# Altium PCB STM32F030F.PcbDoc
Units mil, origin at the board's own origin, x right, y up, seen from the top; angles counter-clockwise.
Board outline 1300 x 1315 mil, 2 copper layers (Top Layer, Bottom Layer); 45 components, 43 nets, 202 pads, 44 vias.
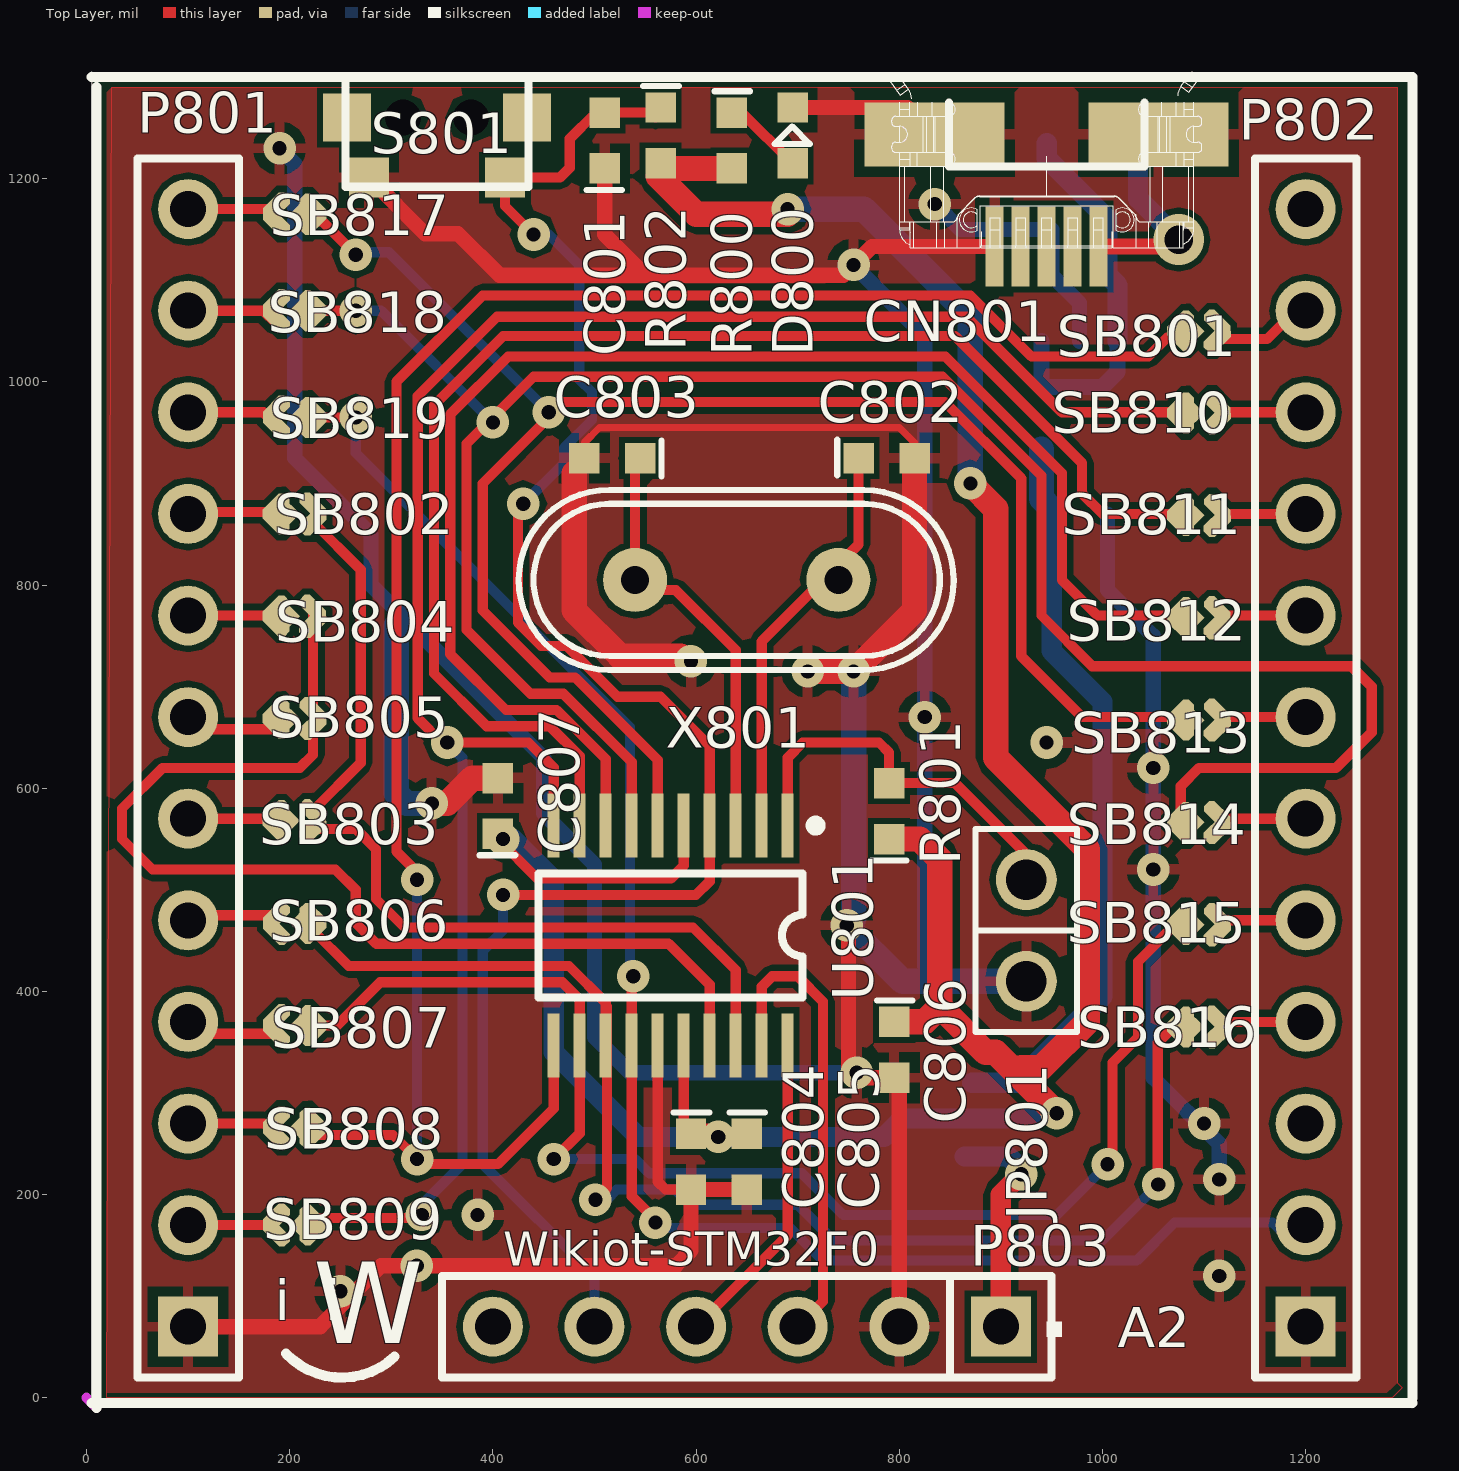
[diagram p0: Top Layer view]
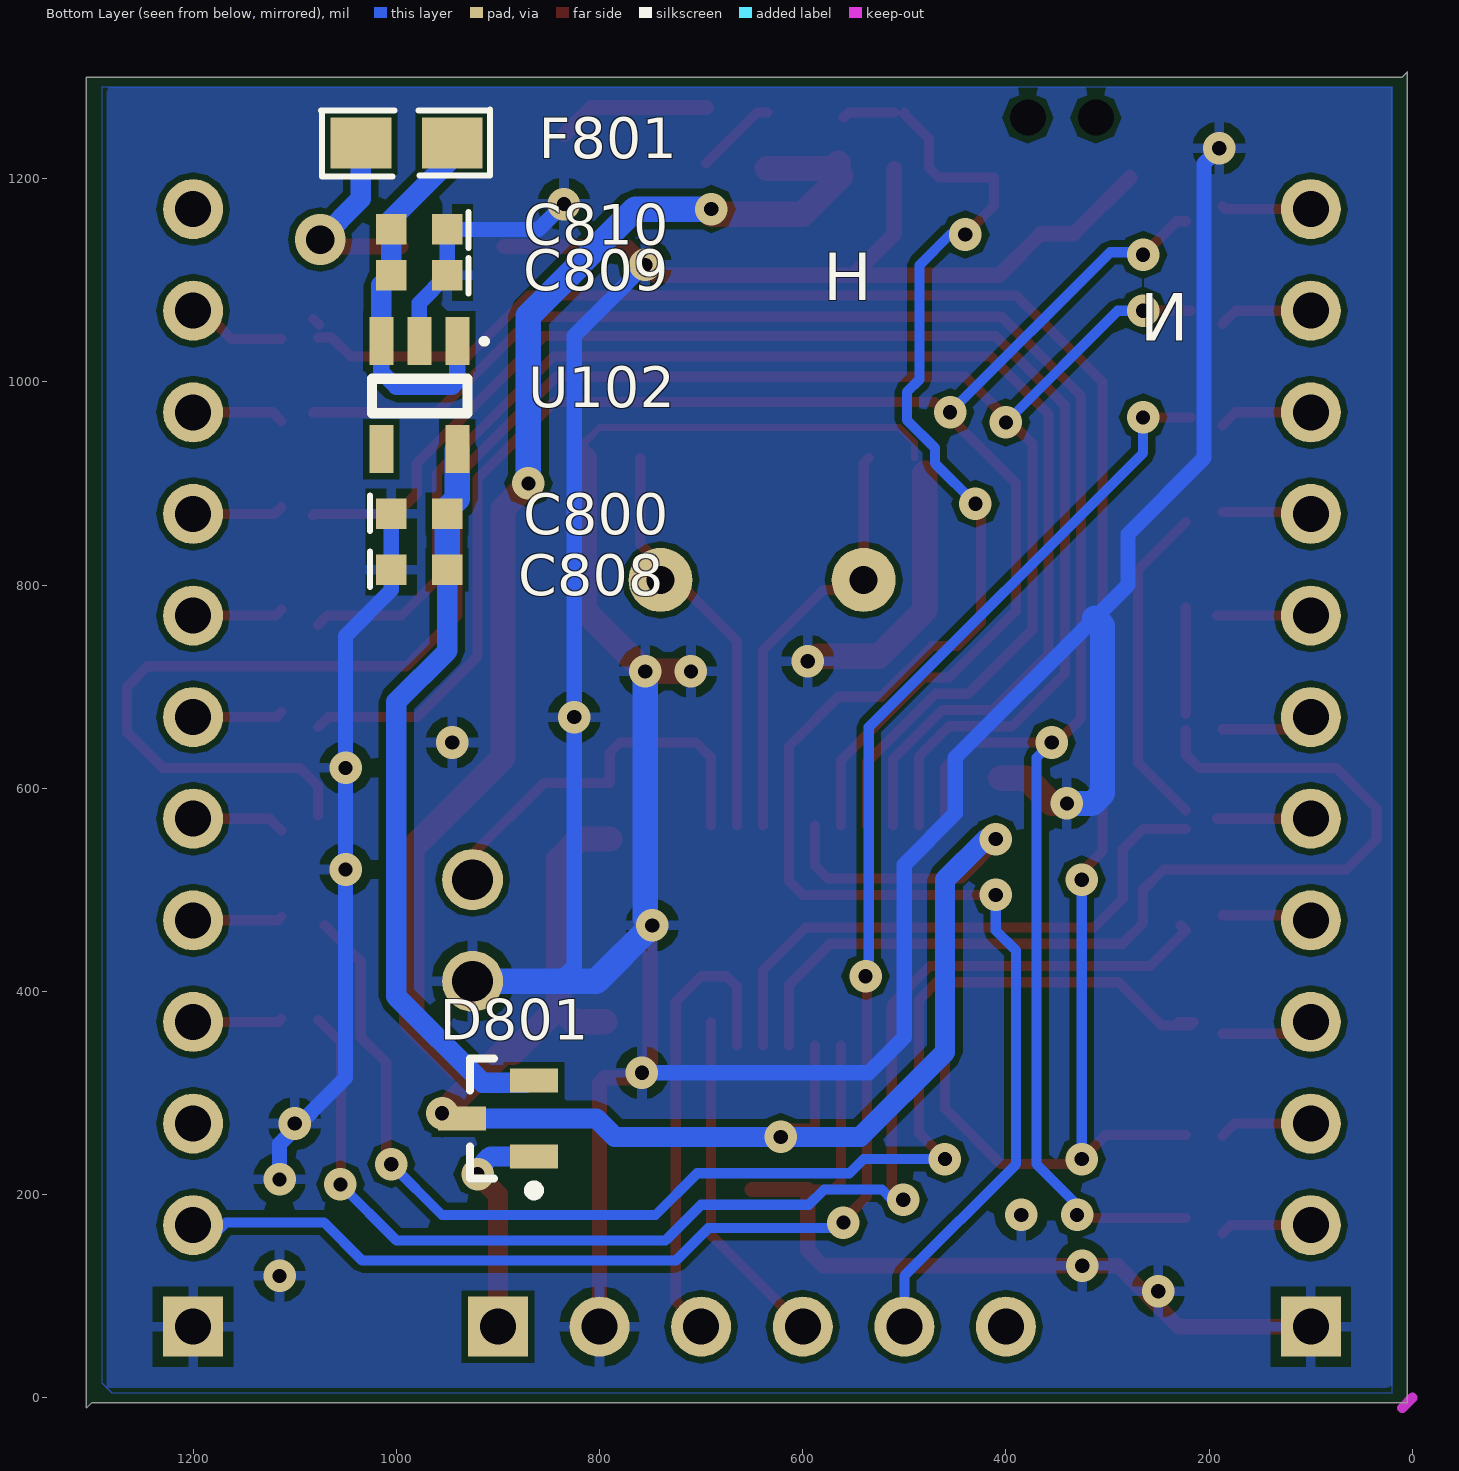
[diagram p1: Bottom Layer view, seen from below]

## Layer stack, top to bottom
Top Solder: solder mask 0.4, Solder Resist, Dk 3.5
Top Layer: signal copper 1.4
Dielectric1: dielectric 12.6, FR-4, Dk 4.8
Bottom Layer: signal copper 1.4
Bottom Solder: solder mask 0.4, Solder Resist, Dk 3.5

## Board outline
5,1305 10,1300 1305,1300 1305,-10 1300,-5 5,-5

## Design rules (kind name [scope] priority, off if disabled: settings)
Clearance [All] p1: gap=6
PolygonConnect [All] p1: connectstyle=Relief reliefconductorwidth=10 reliefentries=4 polygonreliefangle="90 Angle" airgapwidth=10
RoomDefinition STM32F030F [InComponentClass('STM32F030F')] p1: confinementstyle=ConfineIn formatcopy=TRUE lockcomponents=FALSE outline 0,-10 1305,-10 1305,1315 0,1315
RoutingVias [All] p1: holewidth=12 width=25 viastyle="Through Hole" minholewidth=12 minwidth=25 maxholewidth=28 maxwidth=50
SolderMaskExpansion [All] p1: expansion=4
Width [All] p1: maxlimit=55 minlimit=7 preferedwidth=10
30 further rules are at their usual default settings.

## Components (designator, comment, footprint, x,y, rotation, side; value= is the part's Value field where it differs from the comment)
C800 "1uF" 0603M 1005,870 r180 bottom
C801 "100nF" 0603M 510,1210 r90 top
C802 "20pF" 0603M 760,925 r0 top
C803 "20pF" 0603M 545,925 r180 top
C804 "1uF" 0603M 595,260 r270 top
C805 "100nF" 0603M 650,260 r270 top
C806 "100nF" 0603M 795,370 r270 top
C807 "100nF" 0603M 405,555 r90 top
C808 "0.1uF" 0603M 1005,815 r180 bottom
C809 "0.1uF" 0603M 950,1105 r0 bottom
C810 "1uF" 0603M 950,1150 r0 bottom
CN801 "USB-Micro" USB-MICRO-Female-Lite 945,1240 r0 top
D800 "RED" 0603pn 695,1215 r90 top
D801 "BAT54C" BAT54C 900,275 r0 bottom
F801 "500mA" 0805 945,1235 r0 bottom
JP801 "Jumper2" SIP2 925,410 r90 top
P801 "Synio Header-L 12-Pin" HDR1X12 100,70 r90 top
P802 "Synio Header-R 12-Pin" HDR1X12 1200,70 r90 top
P803 "Synio Power Header 6 Pin" HDR1X6/2.54MM 900,70 r180 top
R800 "1K" 0603M 635,1265 r270 top
R801 "10K" 0603M 790,550 r90 top
R802 "100K" 0603M 565,1270 r270 top
S801 "RESET" KEY-2x4-SMD 345,1260 r0 top
SB801 "Circuit Breaker" JP2_SMD 1095,1050 r180 top
SB802 "Circuit Breaker" JP2_SMD 204.74,870 r180 top
SB803 "Circuit Breaker" JP2_SMD 204.74,567.97 r180 top
SB804 "Circuit Breaker" JP2_SMD 204.74,769.32 r180 top
SB805 "Circuit Breaker" JP2_SMD 204.74,668.65 r180 top
SB806 "Circuit Breaker" JP2_SMD 205,467.03 r0 top
SB807 "Circuit Breaker" JP2_SMD 205,366.35 r0 top
SB808 "Circuit Breaker" JP2_SMD 205,265.68 r0 top
SB809 "Circuit Breaker" JP2_SMD 205,170 r0 top
SB810 "Circuit Breaker" JP2_SMD 1095,969.29 r180 top
SB811 "Circuit Breaker" JP2_SMD 1095,868.57 r180 top
SB812 "Circuit Breaker" JP2_SMD 1095,767.86 r180 top
SB813 "Circuit Breaker" JP2_SMD 1095,667.14 r180 top
SB814 "Circuit Breaker" JP2_SMD 1095,566.43 r180 top
SB815 "Circuit Breaker" JP2_SMD 1095,465.71 r180 top
SB816 "Circuit Breaker" JP2_SMD 1095,365 r180 top
SB817 "Circuit Breaker" JP2_SMD 205,1165 r0 top
SB818 "Circuit Breaker" JP2_SMD 205,1070 r0 top
SB819 "Circuit Breaker" JP2_SMD 205,965 r0 top
U102 "LDO" SOT23-5 940,1040 r0 bottom
U801 "STM32F030F4" TSSOP20 575,455 r180 top
X801 "8MHz" XTAL_49S 640,805 r0 top

## Footprints (in the part's own frame and the unit in brackets; to place one, negate y for a bottom-side part, rotate by r counter-clockwise, add the part's x,y. Pads: shape width x height; smd on the part's side, far side on the other; paste and mask are expansions set on the pad)
0603M [mil]
  rect 30x30 smd: 1(0,0) 2(55,0)
  silkscreen extent -21,-17 -21,18, body extent -5,-15 60,15, height 43
0603pn [mil]
  rect 30x30 smd: 1(0,0) 2(55,0)
  silkscreen extent 19,-17 36,18
0805 [mil]
  rect 60x50 smd: 1(0,0) 2(90,0)
  silkscreen extent -37,-33 129,33
BAT54C [mm] "SOT23, 3-Leads, Body 2.9x1.3mm, Pitch 0.95mm, Lead Span 2.5mm, IPC High Density"
  rect 1.2x0.6 smd: 1(-0.9,0.95) 2(-0.9,-0.95) 3(0.9,0)
  silkscreen extent -1.02,-1.5 0.7,1.92, body extent -0.7,-1.5 0.7,1.5, height 1.1
HDR1X6/2.54MM [mm] "Connector; Header; 6 Position"
  rect 1.5x1.5 hole 0.9: 1(0,0)
  round 1.5 hole 0.9: 2(2.54,0) 3(5.08,0) 4(7.62,0) 5(10.16,0) 6(12.7,0)
  silkscreen extent -1.52,-1.27 13.97,1.27
HDR1X12 [mm] "Connector; Header; 12 Position"
  rect 1.5x1.5 hole 0.9: 1(0,0)
  round 1.5 hole 0.9: 2(2.54,0) 3(5.08,0) 4(7.62,0) 5(10.16,0) 6(12.7,0) 7(15.24,0) 8(17.78,0) 9(20.32,0) 10(22.86,0) 11(25.4,0) 12(27.94,0)
  silkscreen extent -1.27,-1.27 29.21,1.27
JP2_SMD [mil]
  oct 15x30 smd rot 45: 1(-18,-8) 2(18,7)
  oct 15.75x30 smd rot 135: 1(-18,8)
  rect 26x26 smd rot 45: 2(13,0)
  oct 15x30 smd rot 135: 2(18,-7)
KEY-2x4-SMD [mm] "6.8MM,2.8MM,SMD"
  rect 1.2x1.2 smd: 0(-2.25,0) 0(2.25,0)
  rect 1x1 smd: 1(-1.7,-1.5) 2(1.7,-1.5)
  round 0.8 hole 0.9 unplated: MH1(0.85,0) MH2(-0.85,0)
  silkscreen extent -2.29,-1.73 2.29,1.02, body extent -2.28,-1.6 2.29,0.94, height 1.1
SIP2 [mil]
  round 60 hole 40: 1(0,0) 2(100,0)
  silkscreen extent -50,-50 150,50
SOT23-5 [mm]
  rect 0.6x1.2 smd: 1(0,0) 2(0.95,0) 3(1.9,0) 4(1.9,2.7) 5(0,2.7)
  silkscreen extent -0.69,0 2.13,1.8, body extent -0.32,0.7 2.35,2.1, height 1.1
TSSOP20 [mm] "Shrink Small Outline; 20 Leads; Body Width 4.4 mm; Pitch 0.65 mm"
  rect 0.3x1.6 smd: 1(-2.925,-2.75) 2(-2.275,-2.75) 3(-1.625,-2.75) 4(-0.975,-2.75) 5(-0.325,-2.75) 6(0.325,-2.75) 7(0.975,-2.75) 8(1.625,-2.75) 9(2.275,-2.75) 10(2.925,-2.75) 11(2.925,2.75) 12(2.275,2.75) 13(1.625,2.75) 14(0.975,2.75) 15(0.325,2.75) 16(-0.325,2.75) 17(-0.975,2.75) 18(-1.625,2.75) 19(-2.275,2.75) 20(-2.925,2.75)
  silkscreen extent -3.75,-2.87 3.3,1.55
USB-MICRO-Female-Lite [mm] "Connector; USB2.0, Type B, SM; 5 Position; Right Angle"
  rect 3.5x1.6 smd: 0(-2.802,0.088) 0(2.798,0.088)
  rect 0.45x2 smd: 1(1.298,-2.714) 2(0.648,-2.714) 3(-0.002,-2.714) 4(-0.652,-2.714) 5(-1.302,-2.714)
  silkscreen extent -3.92,-2.74 3.88,1.65
XTAL_49S [mm] "Hole 1.6mm"
  round 1.6 hole 0.7: 1(2.54,0) 2(-2.54,0)
  silkscreen extent -5.45,-2.25 5.42,2.25

## Part data
C800 C805 C806 C807 C808 C809 C810: library part Cap, "Capacitor"
C801 C802 C803 C804: library part CAP, "Capacitor"
D800: library part LED0, "Typical INFRARED GaAs LED"
D801: "DOUBLE SHOTTKEY DIODES"
F801: library part "Fuse 1", "Fuse"
JP801: library part Jumper2-2
P801: "Synio Header-L, 12-Pin"
P802: "Synio Header-R, 12-Pin"
R800: library part Res2, "Resistor"
R801 R802: library part res1, "Resistor"
S801: library part SW-PB, "Switch"
U102: library part LDO-SOT23-5, "General LDO SOT23-5"
X801: library part XTAL, "Crystal Oscillator"

## Via types
v1: diameter 32, hole 14, Top Layer to Bottom Layer, 43 vias
v2: diameter 50, hole 28, Top Layer to Bottom Layer, 1 vias

## Nets (pads, with @x,y where several pads share a name; then routed paths per layer and width w, separated by ;. In a path a pad name is that pad's centre, name@x,y a point inside that pad or via, vN(x,y) a via of type N, cw(c..) or ccw(c..) an arc to the next point about the centre after c; other vN are vias at no path point)
D3V3: C804.1 C805.1 C806.1 C807.1 D801.3 R800.2 R801.1 R802.2 U801.5 U801.16 | length 2799.1
  Top Layer w10: C807.1@405,550 444,511 575,511 587.8,523.8 U801.5 ; C804.1@587.8,260 U801.16
  Top Layer w20: C804.1 v1@621.75,260
  Top Layer w25: R802.2@562.5,1202.5 600,1165 v1@690,1165 ; R802.2 570,1210 R800.2 ; R801.1 820,550 840,530 840,385 ; C806.1 825,370 840,385 ; v1(870,900) 895,875 895,630 985,540 985,370 940,325 920,325 920,315 ; v1(955,280) 920,315 ; 840,385 885,340 895,340 920,315
  Bottom Layer w20: v1(410,550) 420,550 460,510 460,340 543.25,256.75 v1(621.75,256.75) 785,256.75 803.25,275 D801.3
  Bottom Layer w25: v1(690,1170) 765,1170 870,1065 v1(870,900)
D5V: C809.2 C810.2 F801.1 U102.1 U102.3 | length 377.1
  Bottom Layer w16: U102.1 940,1000 945,995 1000,995 1014.8,1009.8 U102.3
  Bottom Layer w20: F801.1 945,1220 1005,1160 C810.2 C809.2 1014.8,1095.2 U102.3
EX_D3V3: D801.1 P803.1 | length 218.9
  Top Layer w20: P803.1 900,200 v1(920,220)
  Bottom Layer w20: D801.1 907.4,237.6 v1@920,225
GND: C800.1 C801.1 C802.2 C803.2 C804.2 C805.2 C806.2 C807.2 C808.1 C809.1 C810.1 CN801.0 CN801.5 D800.2 JP801.1 P801.1 P802.1 P803.2 S801.1 U102.2 U801.15 | length 6803.6
  Top Layer w7: C803.2 490,940 505,955 800,955 815,940 C802.2
  Top Layer w10: U801.15 562.2,212.8 570,205 C804.2
  Top Layer w15: P801.1 230,70 290,130 v1(325,130) 580,130 595,145 C804.2 C805.2 ; S801.1 333.27,1145.75 365.75,1145.75 406.5,1105 550,1105 ; C801.1 510,1145 550,1105 ; D800.2 808.16,1270 CN801.0@834.7,1243.46 ; v1@750,470 750,325 760,315 C806.2 800,310 P803.2 ; CN801.5 773.14,1133.14 v1(755,1115) 745,1105 550,1105
  Top Layer w25: v1(340,585) 355,585 380,610 C807.2 ; C803.2@480,910 480,775 525,730 v1@585,730 ; v1(710,715) v1(755,715) 815,775 C802.2
  Bottom Layer w15: v1(190,1230) 205,1215 205,925 280,850 280,800 312.5,767.5 450,630 450,575 500,525 500,355 535,320 v1(758.23,320) ; v1(755,1115) 825,1045 825,425 840,410 ; v1(835,1175) 860,1150 C810.1 C809.1 977.4,1077.6 U102.2 ; C800.1 C808.1 1005,795 1050,750 1050,315 1115,250 v1(1115,215)
  Bottom Layer w25: 312.5,767.5 305,760 305,595 315,585 v1(340,585) ; v1(755,715) 755,471.77 v1(748.23,465) 803.23,410 840,410 JP801.1
  other v1: 250,105 1115,120 385,180 1100,270 1050,520 1050,620 945,645 825,670 595,725
NetC800_2: C800.2 C808.2 D801.2 U102.5 | length 721.8
  Bottom Layer w20: D801.2@871.97,310 915,310 1000,395 1000,685 950,735 C808.2
  Bottom Layer w25: U102.5 940,885 950,875 C800.2 C808.2@950,820
NetC802_1: C802.1 U801.2 X801.1 | length 401.3
  Top Layer w10: U801.2 664.57,744.57 760,840 C802.1
NetC803_1: C803.1 U801.3 X801.2 | length 428.2
  Top Layer w10: C803.1@535,925 540,920 540,795 580,795 638.98,736.02 U801.3
NetCN801_1: CN801.1 F801.2 | length 213.3
  Top Layer w16: CN801.1 1078.14,1133.14 1085,1140 v2(1075,1140)
  Bottom Layer w20: F801.2 1035,1180 v2(1075,1140)
NetD800_1: D800.1 R800.1 | length 80.7
  Top Layer w10: R800.1 645,1265 D800.1
NetJP801_2: JP801.2 R801.2 U801.1 | length 406
  Top Layer w10: U801.1 690.16,630.16 705,645 780,645 790,635 R801.2 855,605 925,535 JP801.2@925,500
NetP801_2: P801.2 SB809.1 | length 90.3
  Top Layer w10: P801.2 179,170 SB809.1@187,162
NetP801_3: P801.3 SB808.1 | length 92.1
  Top Layer w10: P801.3 174.68,270 SB808.1@187,257.68
NetP801_4: P801.4 SB807.1 | length 91.8
  Top Layer w10: P801.4 111.65,358.35 SB807.1@187,358.35
NetP801_5: P801.5 SB806.1 | length 89.1
  Top Layer w10: P801.5 105.03,475.03 SB806.1@187,475.03
NetP801_10: P801.10 SB819.1 | length 92.4
  Top Layer w10: P801.10 174,970 SB819.1@187,957
NetP801_11: P801.11 SB818.1 | length 92.4
  Top Layer w10: P801.11 174,1070 SB818.1@187,1057
NetP801_12: P801.12 SB817.1 | length 88.2
  Top Layer w10: P801.12 184,1170 SB817.1@187,1173
NetP802_4: P802.4 SB816.1 | length 88.2
  Top Layer w10: SB816.1@1113,373 1116,370 P802.4
NetP802_5: P802.5 SB815.1 | length 88.5
  Top Layer w10: SB815.1@1113,473.71 1116.71,470 P802.5
NetP802_6: P802.6 SB814.1 | length 91.8
  Top Layer w10: SB814.1@1113,558.43 1124.57,570 P802.6
NetP802_7: P802.7 SB813.1 | length 89.1
  Top Layer w10: SB813.1@1113,675.14 1118.14,670 P802.7
NetP802_8: P802.8 SB812.1 | length 89.4
  Top Layer w10: SB812.1@1113,775.86 1118.86,770 P802.8
NetP802_9: P802.9 SB811.1 | length 89.7
  Top Layer w10: SB811.1@1113,876.57 1119.57,870 P802.9
NetP802_10: P802.10 SB810.1 | length 90.6
  Top Layer w10: SB810.1@1113,961.29 1121.71,970 P802.10
NetP802_11: P802.11 SB801.1 | length 88.6
  Top Layer w10: SB801.1@1113,1042 1162,1042 P802.11@1190,1070
NRST: C801.2 P803.5 R802.1 S801.2 U801.4 | length 1759.9
  Top Layer w10: v1(410,495) 600,495 613.39,508.39 U801.4 613.39,641.61 565,690 522.63,690 472.63,740 447.63,740 424.57,763.06 424.57,880 v1(430,880) ; v1(440,1145) 411.93,1173.07 S801.2 465.94,1200.94 475.69,1210.69 475.69,1239.31 500,1263.62 C801.2@500,1265 ; C801.2 555,1265 R802.1@560,1260
  Bottom Layer w10: v1(410,495) 410,460 390,440 390,230 500,120 P803.5 ; v1(430,880) 470,920 470,935 497.5,962.5 497.5,990 485,1002.5 485,1115 455,1145 v1(440,1145)
PA0/CTS1: SB813.2 SB817.2 U801.6 | length 1689.8
  Top Layer w10: SB817.2@223,1158 232,1158 v1(265,1125) ; U801.6 562.2,627.8 481,709 456,709 390,775 390,900 470,980 845,980 920,905 920,730 980,670 1067.14,670 SB813.2@1077,660.14
  Bottom Layer w10: v1(265,1125) 267.5,1127.5 297.5,1127.5 v1(455,970)
PA1/RTS1: SB814.2 SB818.2 U801.7 | length 2098.4
  Top Layer w10: SB818.2@218,1070 v1(265,1070) ; U801.7 536.61,625.76 469.37,693 437,693 374,756 374,939 440,1005 842.63,1005 940,907.63 940,770 990,720 1245,720 1265,700 1265,655 1230,620 1095,620 1077,602 SB814.2@1077,573.43
  Bottom Layer w10: v1(265,1070) 290,1070 v1(400,960)
PA2/TX1: SB812.2 U801.8 | length 1410.9
  Top Layer w10: U801.8 511.02,628.72 462.75,677 413,677 358,732 358,968 415,1025 845.25,1025 960,910.25 960,805 995,770 1067.86,770 SB812.2@1077,760.86
PA3/RX1: SB811.2 U801.9 | length 1368.4
  Top Layer w10: U801.9 485.43,631.68 456.12,661 394,661 342,713 342,977 410,1045 855,1045 980,920 980,890 1000,870 1080.57,870 SB811.2@1082,868.57
PA4/SS: SB809.2 SB810.2 U801.10 | length 1958.6
  Top Layer w10: SB809.2@223,177 327,177 v1(330,180) ; U801.10 459.84,620.16 435,645 v1(355,645) 350,645 326,669 326,986 404,1064 866,1064 960,970 1081.29,970 SB810.2@1082,969.29
  Bottom Layer w10: v1(330,180) 330,190 370,230 370,630 ; v1(355,645) 370,630 ; v1@365,635 370,630
PA5/SCK: SB801.2 SB808.2 U801.11 | length 1947.2
  Top Layer w10: SB808.2@223,258.68 301.76,258.68 v1(325.43,235) ; v1@329,514 305,538 305,1000 390,1085 870,1085 930,1025 1045,1025 1063.5,1043.5 1076.5,1043.5 SB801.2@1077,1043 ; v1@330.68,225.68 335,230 405,230 459.84,284.84 U801.11 ; SB801.2@1076,1056 1077,1057 SB801.2@1082,1062
  Bottom Layer w10: v1(325.43,235) v1(325.43,510)
PA6/MISO: SB807.2 SB815.2 U801.12 | length 1323.3
  Top Layer w10: SB807.2@215,370 SB807.2@230,370 ; SB807.2@218,366.35 246.35,366.35 289,409 468.37,409 485.43,391.94 U801.12 485.43,260.43 v1(460,235) ; v1@1010,230 1010,330 1035,355 1035,429.29 SB815.2@1070.71,465
  Bottom Layer w10: v1(460,235) 540,235 554,221 704,221 745,180 955,180 v1(1005,230)
PA7/MOSI: SB806.2 SB816.2 U801.13 | length 1336.8
  Top Layer w10: SB806.2@227.97,465 223,460.03 258.03,425 475,425 511.02,388.98 U801.13 U801.13@512.43,345.32 ; v1(501,195) 512.43,206.43 U801.13@512.43,345.32 ; 512.43,385.32 U801.13@512.43,345.32 ; v1@1054.43,210 1054.43,349.43 SB816.2@1077,372
  Bottom Layer w10: v1(501,195) 512,195 522,205 579,205 594,190 700,190 735,155 1000,155 v1(1055,210)
PA9/SCL1/TX1: SB804.1 SB805.1 U801.17 | length 1085.7
  Top Layer w10: SB805.1@223,657 223,633 210,620 75,620 35,580 35,550 65,520 245,520 265,500 265,467.37 285.37,447 573,447 613.39,406.61 U801.17 ; SB805.1@223,673 SB804.1@223,778
PA10/SDA1/RX1: SB802.1 SB803.1 U801.18 | length 899.7
  Top Layer w10: SB803.1@222.74,559.97 265.03,559.97 285,540 285,491 313,463 597,463 638.98,421.02 U801.18 ; SB803.1@223,578 270,625 270,815 SB802.1@223,862
PB1/TIM3_CH4: P802.2 SB819.2 U801.14 | length 1661.2
  Top Layer w10: SB819.2@218,965 v1(265,965) v1@270,965 ; v1(538.23,415) 536.61,416.61 U801.14 536.61,198.39 v1@561.25,173.75 ; v1@560,170 v1(560,172.5)
  Bottom Layer w10: v1(265,965) 265,930 535,660 v1@535,410 ; v1(560,172.5) 565.5,167 693,167 725,135 1033.62,135 1071.12,172.5 1167.5,172.5 1185,155 P802.2
RX1: P801.9 SB802.2 | length 87.8
  Top Layer w10: P801.9 102,872 SB802.2@187,872
SCL1: P801.7 SB805.2 | length 92
  Top Layer w10: P801.7 112,658 SB805.2@187,658
SDA1: P801.6 SB803.2 | length 92
  Top Layer w10: P801.6 SB803.2@192,570
SWCLK: P803.4 U801.20 | length 337.3
  Top Layer w10: P803.4 690.16,160.16 U801.20@690.16,370
SWDIO: P803.3 U801.19 | length 463.3
  Top Layer w10: U801.19 664.57,404.57 675,415 700,415 725,390 725,95 P803.3
TX1: P801.8 SB804.2 | length 92
  Top Layer w10: P801.8 SB804.2@192,770
pads on no net: CN801.2 CN801.3 CN801.4 P802.3 P802.12 P803.6 S801.0 S801.MH1 S801.MH2 U102.4

## Polygon pours and split planes (outlines as drawn)
GND on Top Layer "Top Layer-GND" (solid, remove dead copper, pour order 24): 20,1285 25,1290 1290,1290 1290,15 1285,10 1280,5 15,5 20,5
GND on Top Layer "Top Layer-GND" (solid, remove dead copper, shelved, pour order 20): 25,1290 1290,1290 1290,15 1295,10 1285,0 20,0
GND on Bottom Layer "Top Layer-GND" (solid, remove dead copper, pour order 26): 20,5 25,10 1285,10 1285,1285 1290,1290 20,1290
GND on Bottom Layer "Top Layer-GND" (solid, remove dead copper, shelved, pour order 18): 20,1290 1290,1290 1290,15 1280,5 20,5

## Keep-outs
Keep-Out Layer:
  lines w10: 0,0 10,-10

## Silkscreen, mask and mechanical layers (free items; w line width, h text height)
Top Overlay:
  lines w10: 5,-5 1305,-5 ; 5,1300 1305,1300 1305,0 ; 10,-10 10,1290 ; 196.28,43.58 ccw(c251.28,95.58) 303.28,40.58
  text "Wikiot-STM32F0" at 410,130 h33.46
  text "i  i" at 185.28,76.58 h40
  text "W" at 223.28,53.58 h80
  text "A2" at 1015,50 h39.37
Bottom Overlay:
  text "H" at 580,1065 h80
  text "N" at 220,1025 h80